# Altium PCB MT-ACcharger V1.0.0.PcbDoc (part 2 of 2)
Units mil, origin at the board's own origin, x right, y up, seen from the top; angles counter-clockwise.
Board outline 4330 x 3150 mil, 2 copper layers (Top Layer, Bottom Layer); 249 components, 156 nets, 1213 pads, 95 vias.
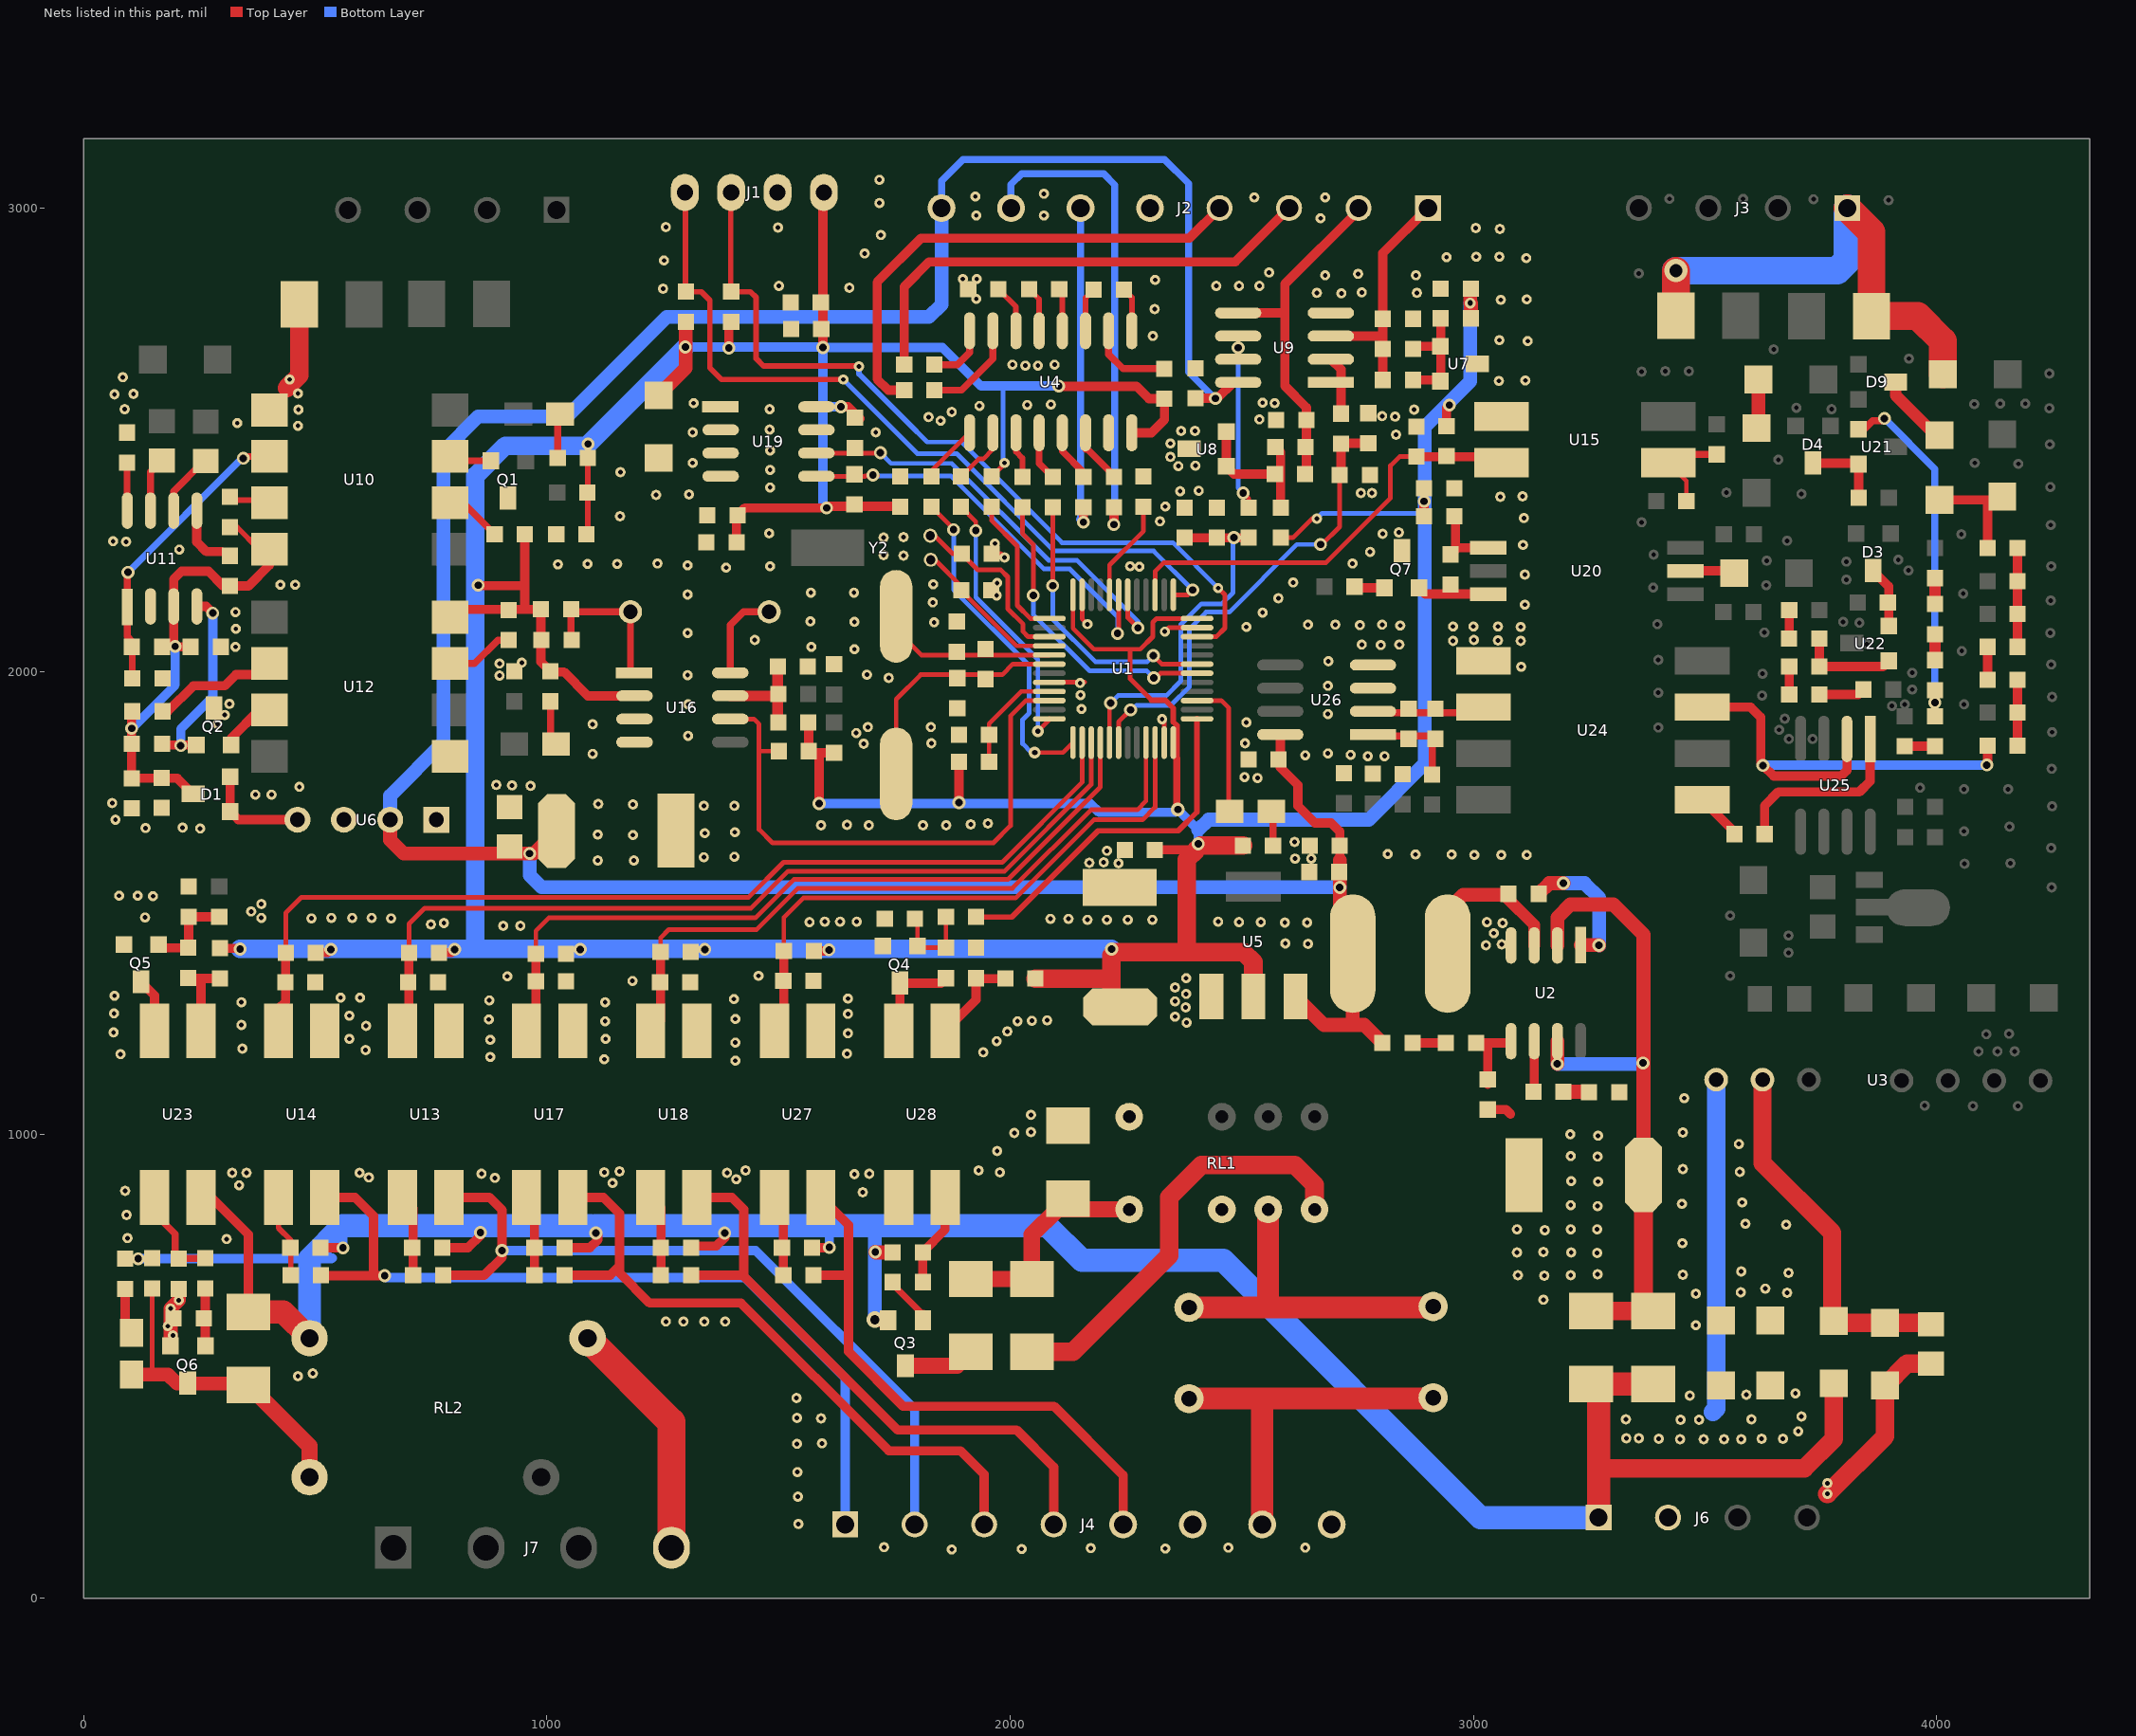
[diagram p2: the nets of this part, all layers, seen from the top]

## Via types
v1: diameter 28, hole 16, Top Layer to Bottom Layer, 77 vias
v2: diameter 22, hole 10, Top Layer to Bottom Layer, 12 vias
v3: diameter 26, hole 12, Top Layer to Bottom Layer, 2 vias
v4: diameter 36, hole 20, Top Layer to Bottom Layer, 1 vias
v5: diameter 50, hole 28, Top Layer to Bottom Layer, 1 vias
v6: diameter 30, hole 16, Top Layer to Bottom Layer, 1 vias
v7: diameter 24, hole 12, Top Layer to Bottom Layer, 1 vias

## Nets (pads, with @x,y where several pads share a name; then routed paths per layer and width w, separated by ;. In a path a pad name is that pad's centre, name@x,y a point inside that pad or via, vN(x,y) a via of type N, cw(c..) or ccw(c..) an arc to the next point about the centre after c; other vN are vias at no path point) (continued)
DGND: C1.2 C2.1 C3.1 C4.1 C8.1 C12.1 C14.1 C15.2 C16.2 C18.2 C19.2 C22.1 C23.1 C24.1 C25.1 C26.1 C28.2 C29.1 C30.1 C33.1 C34.1 C35.2 C38.2 C39.2 C41.2 C43.2 C44.2 C48.2 C49.2 C50.1 C51.1 C62.2 C66.1 C67.1 C68.1 C69.1 C71.2 EC1.2 EC2.2 EC5.2 J1.3 J2.5 L6.2 L7.2 pad.0@77,1516 pad.1@117,1516 pad.2@150,1515 pad.3@133,1469 pad.4@67,1300 pad.5@66,1262 pad.6@65,1221 pad.7@80,1174 pad.8@341,1286 pad.9@341,1237 pad.10@343,1186 pad.11@384,1498 pad.12@384,1468 pad.13@362,1482 pad.14@492,1467 pad.15@535,1468 pad.16@580,1468 pad.17@622,1468 pad.18@664,1467 pad.19@555,1296 pad.20@597,1296 pad.21@574,1257 pad.22@574,1207 pad.23@610,1235 pad.24@609,1183 pad.25@750,1454 pad.26@778,1457 pad.27@906,1451 pad.28@943,1451 pad.29@915,1342 pad.30@876,1290 pad.31@875,1249 pad.32@878,1205 pad.33@878,1168 pad.34@1126,1286 pad.35@1126,1245 pad.36@1127,1207 pad.37@1124,1163 pad.38@1185,1332 pad.39@1457,1343 pad.40@1404,1293 pad.41@1407,1250 pad.42@1407,1199 pad.43@1407,1160 pad.44@1650,1261 pad.45@1650,1219 pad.46@1648,1175 pad.47@1650,1294 pad.48@1567,1459 pad.49@1600,1460 pad.50@1633,1460 pad.51@1669,1460 pad.52@1942,1178 pad.53@1971,1202 pad.54@1994,1223 pad.55@2016,1245 pad.56@2047,1246 pad.57@2080,1247 pad.58@2087,1466 pad.59@2126,1466 pad.60@2167,1464 pad.61@2209,1464 pad.62@2254,1464 pad.63@2307,1464 pad.64@2171,1587 pad.65@2202,1588 pad.66@2234,1586 pad.67@2209,1613 pad.68@2380,1338 pad.69@2380,1304 pad.70@2379,1275 pad.71@2381,1242 pad.72@2356,1318 pad.73@2356,1288 pad.74@2356,1255 pad.75@2449,1460 pad.76@2494,1459 pad.77@2541,1459 pad.78@2593,1458 pad.79@2641,1458 pad.80@2594,1413 pad.81@2643,1412 pad.82@2815,1606 pad.83@2875,1605 pad.84@2953,1605 pad.85@3002,1604 pad.86@3060,1604 pad.87@3115,1604 pad.88@3209,1001 pad.89@3210,954 pad.90@3211,900 pad.91@3210,848 pad.92@3210,796 pad.93@3211,746 pad.94@3210,697 pad.95@3269,998 pad.96@3268,953 pad.97@3269,899 pad.98@3268,846 pad.99@3267,796 pad.100@3267,745 pad.101@3268,699 pad.102@3154,794 pad.103@3094,796 pad.104@3094,746 pad.105@3151,747 pad.106@3096,697 pad.107@3153,696 pad.108@3151,644 pad.109@3455,1079 pad.110@3452,1005 pad.111@3452,926 pad.112@3450,851 pad.113@3451,766 pad.114 pad.115@3480,657 pad.116@3480,589 pad.117@3573,980 pad.118@3575,920 pad.119@3630,668 pad.120@3675,806 pad.121@3580,854 pad.122@3587,808 pad.123@3578,705 pad.124@3680,702 pad.125@3577,660 pad.126@3677,659 pad.132@891,1755 pad.133@925,1754 pad.134@965,1753 pad.135@1481,2566 pad.136@1481,2522 pad.137@1482,2477 pad.138@1482,2435 pad.139@1482,2397 pad.140@1159,2430 pad.141@1158,2335 pad.142@1236,2381 pad.143@1307,2382 pad.144@1024,2231 pad.145@1088,2232 pad.146@1152,2232 pad.147@1239,2233 pad.148@1304,2229 pad.149@1387,2224 pad.150@1480,2298 pad.151@1482,2227 pad.152@1727,2289 pad.153@1770,2290 pad.154@1727,2251 pad.155@1770,2250 pad.156@1570,2170 pad.157@1663,2170 pad.158@1569,2108 pad.159@1664,2107 pad.160@1571,2053 pad.161@1664,2048 pad.162@1691,1993 pad.163@1304,2166 pad.164@1304,2083 pad.165@1304,1992 pad.166@1305,1929 pad.167@1305,1861 pad.168@1111,1714 pad.169@1186,1713 pad.170@1110,1648 pad.171@1186,1647 pad.172@1110,1592 pad.173@1188,1592 pad.174@1339,1710 pad.175@1405,1710 pad.176@1341,1651 pad.177@1406,1653 pad.178@1339,1599 pad.179@1405,1600 pad.180@1693,1880 pad.181@1684,1844 pad.182@1829,1880 pad.183@1830,1845 pad.184@1738,1986 pad.185@1099,1886 pad.186 pad.187 pad.188 pad.189 pad.190 pad.191 pad.192 pad.193 pad.194 pad.195 pad.196 pad.197 pad.198 pad.199 pad.200 pad.201 pad.202 pad.203 pad.204 pad.205 pad.206 pad.207 pad.208 pad.209 pad.210 pad.211 pad.212 pad.213 pad.214 pad.215 pad.216 pad.217 pad.218 pad.219 pad.220 pad.221 pad.222 pad.223 pad.224 pad.225 pad.226 pad.227 pad.228 pad.229 pad.230 pad.231 pad.232 pad.233 pad.234 pad.235 pad.236 pad.237 pad.238 pad.239 pad.240 pad.241 pad.242 pad.243 pad.244 pad.245 pad.246 pad.247 pad.248 pad.249 pad.250 pad.251 pad.252 pad.253 pad.254 pad.255 pad.256 pad.257 pad.258 pad.259 pad.260 pad.261 pad.262 pad.263 pad.264 pad.265 pad.266 pad.267 pad.268 pad.269 pad.270 pad.271 pad.272 pad.273 pad.274 pad.275 pad.276 pad.277 pad.278 pad.279 pad.280 pad.281 pad.282 pad.283 pad.284 pad.285 pad.286 pad.287 pad.288 pad.289 pad.290 pad.291 pad.292 pad.293 pad.294 pad.295 pad.296 pad.297 pad.298 pad.299 pad.300 pad.301 pad.302 pad.303 pad.304 pad.305 pad.306 pad.307 pad.308 pad.309 pad.311 pad.312 pad.313 pad.314 pad.315 pad.316 pad.317 pad.318 pad.319 pad.320 pad.321 pad.322 pad.323 pad.324 pad.325 pad.326 pad.327 pad.328 pad.329 pad.330 pad.331 pad.332 pad.333 pad.334 pad.335 pad.336 pad.337 pad.338 Q1.2 Q4.3 Q5.3 Q7.2 R6.2 R7.2 R19.1 R30.1 R31.1 R90.2 R91.1 R94.2 U1.8 U1.23 U1.35 U1.47 U2.4 U4.15 U5.1 U6.1 U7.2 U8.2 U9.4 U12.5 U13.3 U14.3 U15.3 U16.3 U16.4 U17.3 U18.3 U19.1 U19.2 U19.3 U19.4 U19.7 U24.5 U26.3 U26.4 U27.3 | length 385.5
  Top Layer w10: C30.1@1959.5,2178.5 C30.1@1959.5,2175 1972,2187.5 v2(1972,2191) ; C33.1@1960.5,2254 1980,2254 pad.330@1988,2246 ; U1.8@2084.55,1976.47 2160.47,1976.47 pad.322@2161,1977 ; U1.47@2155.42,2165.45 2155.42,2113.58 v2(2167,2102) ; v2(2328,1897) 2332.58,1892.42 U1.23@2332.58,1846.55 ; v2(2334,2086) 2342.58,2094.58 U1.35@2403.45,2094.58
  Top Layer w20: R6.2@3031,1054.5 3070.5,1054.5 3080,1045
  Bottom Layer w10: v2@1969,2170 1969,2166 v2(1971,2164)
  other v2: 1967,2276
DI1: C39.1 R49.1 U1.14 U14.4 | length 2182.2
  Top Layer w10: R49.1@436.5,1393 436.5,1478.5 470.5,1512.5 1435.5,1512.5 1511,1588 1983,1588 2155.5,1760.5 2155.5,1846.47 U1.14@2155.42,1846.55
  Top Layer w20: U14.4@420.93,1224.61 420.93,1271.93 436.5,1287.5 R49.1@436.5,1393
DI1-DET: C37.1 J4.1 U14.2 | length 1788.9
  Top Layer w20: C37.1@512.5,697 513.5,696 v1(650,696) ; U14.2@520.93,864.61 586.39,864.61 626,825 626,697
  Bottom Layer w20: v1(650,696) 654,692 1427,692 1644,475 J4.1@1644,159
DI2: C38.1 R47.1 U1.15 U13.4 | length 1923.9
  Top Layer w10: R47.1@702.5,1393 702.5,1455 736.5,1489 1441,1489 1521,1569 1988.04,1569 2175.1,1756.06 U1.15@2175.1,1846.55
  Top Layer w20: U13.4@688.6,1224.61 702.5,1238.51 R47.1@702.5,1393
DI2-DET: C36.1 J4.2 U13.2 | length 1651.7
  Top Layer w20: C36.1@776.5,697 865,697 903.2,735.2 v1(903.2,750) 903.2,837.8 876.39,864.61 U13.2@788.6,864.61
  Bottom Layer w20: v1(903.2,750) 1451,750 1794,407 J4.2@1794,159
DI3: C48.1 R55.1 U1.16 U17.4 | length 1666.6
  Top Layer w10: R55.1@976.5,1391 976.5,1440 1004.5,1468 1450,1468 1533,1551 1995,1551 2194.79,1750.79 U1.16@2194.79,1846.55
  Top Layer w20: U17.4@956.26,1224.61 976.5,1244.84 C48.1@976.5,1331 R55.1@976.5,1391
DI3-DET: C46.1 J4.3 U17.2 | length 1470.8
  Top Layer w20: U17.2@1038,846.34 U17.2@1056.26,864.61 1122.39,864.61 1156.97,830.03 1156.97,717 ; C46.1@1038.5,697 1136.97,697 1156.97,717 ; J4.3@1944,159 1944,267 1893,318 1738,318 1419,637 1222,637 1156.97,702.03 1156.97,717
DI4: C49.1 R57.1 U1.21 U18.4 | length 1505.7
  Top Layer w10: R57.1@1245.5,1395 1245.5,1425 1263.5,1443 1453,1443 1542,1532 2005,1532 2174.5,1701.5 2274.5,1701.5 2293.21,1720.21 U1.21@2293.21,1846.55
  Top Layer w20: U18.4@1223.93,1224.61 1245.5,1246.18 R57.1@1245.5,1395
DI4-DET: C47.1 J4.4 U18.2 | length 1333.7
  Top Layer w20: C47.1@1311.5,697 1423,697 1425,695 ; U18.2@1323.93,864.61 1399.39,864.61 1425,839 1425,695 ; J4.4@2094,159 2094,283 2014,363 1757,363 1425,695
DI5: C71.1 R96.1 U1.22 U27.4 | length 1292.2
  Top Layer w10: R96.1@1511.5,1397 1511.5,1469 1553.5,1511 2012,1511 2181,1680 2286,1680 2312.9,1706.9 U1.22@2312.9,1846.55
  Top Layer w20: U27.4@1491.6,1224.61 1511.5,1244.51 R96.1@1511.5,1397
DI5-DET: C70.1 J4.5 U27.2 | length 1242.3
  Top Layer w20: C70.1@1575.5,697 1651,697 ; U27.2@1591.6,864.61 1651,805.2 1651,697 ; J4.5@2244,159 2244,265 2095,414 1769,414 1651,532 1651,697
DP3V3: C1.1 C2.2 C3.2 C4.2 C11.2 C12.2 C18.1 C28.1 C31.1 C34.2 C42.1 C43.1 C44.1 EC5.1 J1.4 R1.2 R2.2 R3.2 R13.1 R18.2 R20.2 R21.2 R33.2 R36.2 R41.1 R42.1 R47.2 R49.2 R50.1 R53.2 R55.2 R57.2 R58.1 R59.1 R60.1 R61.1 R65.1 R77.1 R79.2 R96.2 R97.1 U1.24 U1.36 U1.48 U4.16 U5.2 U12.8 U16.2 U19.8 | length 12623.6
  Top Layer w10: R18.2@1960,2420.5 1988,2448.5 v2(1988,2450) ; U1.48@2135.73,2165.45 2135.73,2093.27 2181,2048 2259,2048 ; 2305,1938.27 2259,1984.27 2259,2048 ; U1.36@2403.45,2114.27 2316.27,2114.27 2308,2106 2308,2075 2281,2048 2259,2048 ; R21.2@2584,2288.49 2610.49,2288.49 2652,2330 v2(2662,2330)
  Top Layer w12: C28.1@1085.5,2296 1088.5,2299 R36.2@1088.5,2461 1088.5,2490.5 v1(1089,2491) ; 2305,1938.27 2334.73,1938.27 2352.27,1920.73 2352.27,1891 2360,1883.27 2360,1813
  Top Layer w15: 2360,1813 2360,1704 v6(2362,1702)
  Top Layer w20: R79.2@295,1402.5 336.5,1402.5 v1(338,1401) ; R49.2@501.5,1393 527,1393 v1(534,1400) ; R47.2@767.5,1393 794,1393 v1(801,1400) ; U12.8@790.88,2117 807.88,2134 954,2134 ; v1(852,2186) 853,2185 952.5,2185 ; R33.2@952.5,2296 952.5,2185 ; U16.2@1189.33,1947.24 1088.76,1947.24 1037,1999 1009.5,1999 R41.1@1008,2000.5 987.5,2021 R53.2@987.5,2134 954,2134 ; v1(1393,2698) 1393,2749.5 R3.2@1398,2754.5 ; C34.2@1409.5,2279 1409.5,2335 C43.1@1411.5,2337 1427.5,2353 v1(1604,2353) 1607.5,2356.5 1762,2356.5 C4.2@1763,2355.5 ; R59.1@1564.5,1890 1565.5,1889 R58.1@1565.5,1828 1569,1824.5 1594,1824.5 ; R96.2@1576.5,1397 1607,1397 v1(1609,1399) ; v1(1588,1715) 1588,1818.5 1594,1824.5 ; v1(1596,2699) 1596,3032 J1.4@1598,3034 ; R60.1@1620,1824.5 1594,1824.5 ; v1(1635,2571.24) 1650.26,2571.24 R61.1@1676,2545.5 ; v1(1889.5,1717) R13.1@1889.5,1805 ; v1(2105,2616) 2106,2615 2273,2615 2299.5,2588.5 C11.2@2333,2588.5 2333,2543 2305.2,2515.2 U4.16@2262.7,2515.2 ; EC5.1@2219,1294.43 EC5.1@2228.43,1285 ; C3.2@2312.5,1615 2402,1615 v1@2410.5,1623.5 ; R97.1@2893.5,2335 v1(2893.5,2367) ; R50.1@2942,2529.5 2942,2569 v1(2948,2575) ; 952.5,2185 952.5,2135.5 954,2134
  Top Layer w30: C1.1@1241.48,2595.92 1300,2654.44 R1.2@1300,2754.5 ; v7(2993,2795) C44.1@2993,2825 ; R20.2@2994.5,2762 v7@2994.5,2795
  Top Layer w40: R77.1@2054.5,1337 2219,1337 ; EC5.1@2219,1294.43 2219,1337 ; 2219,1387 2219,1337 ; v1@2226,1394 2381,1394 ; v1@2402,1615 2381,1594 2381,1394 ; v1@2411,1624 R2.2@2502.5,1624 ; U5.2@2525,1298.89 2525,1373 2504,1394 2381,1394
  Bottom Layer w10: v2(1988,2450) 1985,2447 1985,2612 1989,2616 ; v2(2662,2330) 2673,2341 2895,2341
  Bottom Layer w20: v1(1299,2700) 1597,2700 v1(1596,2699) ; v1(1588,1715) 2173,1715 2192,1696 2356,1696 v6(2362,1702) 2406,1658 v1(2406,1628) ; v1(1604,2353) 1596,2361 1596,2572 ; v1(1635,2571.24) 1596.76,2571.24 1596,2572 ; v1(2105,2616) 1989,2616 1937,2616 1854,2699 v1(1596,2699) ; 1596,2572 v1(1596,2699)
  Bottom Layer w30: 2406,1658 2428,1680 2774,1680 2895,1801 2895,2341 2895,2528 2993,2626 v7(2993,2795)
  Bottom Layer w40: v1(338,1401) 846,1401 ; v1@1086,2487 911,2487 846,2422 846,1401 ; v1@1089.5,2490.5 v1(1299,2700) ; v1(2219,1401) 846,1401
  other v1: 1072,1400 1341,1400
EL+: DC4.2 DC5.2 J4.7 | length 802.2
  Top Layer w47.24: DC5.2@2386,430.57 2544,430.57 ; J4.7@2544,159 2544,430.57 ; DC4.2@2913,432.57 2911,430.57 2544,430.57
  Bottom Layer w47.24: DC4.2@2911,430.57 DC4.2@2913,432.57
FAN1: C55.2 D7.1 LED4.2 Q6.2 RL2.1 | length 717
  Top Layer w10: C55.2@148,668.5 148,488.91 154,482.91
  Top Layer w30: LED4.2@103.66,482.91 154,482.91 182.09,482.91 201.75,463.25 334.68,463.25 D7.1@346.35,474.91
  Top Layer w35.43: D7.1@346.35,474.91 D7.1@360,461.26 ; D7.1@356,460.26 488,328.26 RL2.1@488,261
FG: J3.1 L5.1 TVS3.1 TVS4.1 | length 1091.6
  Top Layer w60: TVS3.1@3437,2768 v5(3437,2865) ; J3.1@3807,3000 3859,2948 TVS4.1@3859,2767 3959,2767 4013.16,2712.84 L5.1@4013.16,2641.47
  Bottom Layer w60: v5(3437,2865) 3785,2865 3807,2887 J3.1@3807,3000
IN-ADA: R84.2 U24.3 U25.2 | length 1036.5
  Top Layer w20: U24.3@3494,1923 3598,1923 3620,1901 3620,1802 v1(3625,1797) 3648,1774 3794,1774 3806.24,1786.24 U25.2@3806.24,1854.24 ; v1(4108,1798) v1@4109.5,1796.5 ; R84.2@4109.5,1840 v1@4109.5,1796.5 ; v1@4109.5,1796.5 4110,1796 4109.5,1795.5 v1@4109.5,1796.5
  Bottom Layer w20: v1(3625,1797) 3626,1798 v1(4108,1798)
LOCK1: R85.1 U1.25 | length 772
  Top Layer w12: R85.1@1926.5,1470 2004,1470 2190,1656 2363,1656 2403.45,1696.45 U1.25@2403.45,1897.73
NetC5_2: C5.2 D12.2 DC1.1 U3.2 | length 786.2
  Top Layer w39.37: U3.2@3624,1119 3624,939 3774,789 D12.2@3774,604.5 ; D12.2@3778,598.5 3782.58,593.92 3982.18,593.92 C5.2@3984.68,591.42
NetC7_2: C7.2 U2.1 | length 296
  Top Layer w30: C7.2@3140.5,1520 3163.5,1543 v1(3194,1543) ; U2.1@3231.24,1409.85 3270.15,1409.85 v1(3271,1409)
  Bottom Layer w30: v1(3194,1543) 3240,1543 3271,1512 v1(3271,1409)
NetC9_1: C9.1 U2.6 | length 97.3
  Top Layer w20: C9.1@3130.5,1105 3131.24,1105.74 U2.6@3131.24,1201.98
NetC9_2: C9.2 R7.1 | length 55.4
  Top Layer w30: C9.2@3194.5,1093 3248.5,1093 R7.1@3249.5,1092
NetC10_1: C10.1 U4.3 | length 96.3
  Top Layer w12: U4.3@2162.7,2735.2 2162.7,2806.33 C10.1@2180.52,2824.15
NetC10_2: C10.2 U4.1 | length 96.1
  Top Layer w12: C10.2@2245.52,2824.15 2262.7,2806.96 U4.1@2262.7,2735.2
NetC11_1: C11.1 U4.2 | length 184
  Top Layer w15: U4.2@2212.7,2735.2 2212.7,2684.3 2243.5,2653.5 C11.1@2333,2653.5
NetC13_1: C13.1 U4.5 | length 98.9
  Top Layer w12: C13.1@2041.02,2825.15 2062.7,2803.46 U4.5@2062.7,2735.2
NetC13_2: C13.2 U4.4 | length 92.7
  Top Layer w12: C13.2@2106.02,2825.15 2112.7,2818.46 U4.4@2112.7,2735.2
NetC14_2: C14.2 U4.6 | length 105.8
  Top Layer w12: C14.2@1974.52,2825.15 2012.7,2786.96 U4.6@2012.7,2735.2
NetC19_1: C19.1 R13.2 U1.9 | length 241.1
  Top Layer w10: R13.2@1954.5,1805 C19.1@1954.5,1863 1954.5,1887.29 2024,1956.79 U1.9@2084.55,1956.79
NetC32_1: C32.1 R35.1 U10.6 U11.1 | length 642.6
  Top Layer w15: v1(96,2214) 96,2212.49 94.76,2211.24 U11.1@94.76,2139.15 94.76,2075.24 105.5,2064.5 C32.1@105.5,1985 ; v1(345,2460) 349,2464 U10.6@401.12,2464
  Bottom Layer w15: v1(96,2214) 342,2460 v1(345,2460)
NetC36_2: C36.2 R46.1 U13.1 | length 177.1
  Top Layer w20: U13.1@688.6,864.61 711.5,841.7 C36.2@711.5,697
NetC37_2: C37.2 R48.1 U14.1 | length 178.6
  Top Layer w12.13: U14.1@420.93,864.61 420.93,799.07 447.5,772.5 C37.2@447.5,697
NetC40_1: C40.1 R52.2 U15.1 | length 210.3
  Top Layer w10: U15.1@3438.81,2468.5 U15.1@3420.61,2450.3 3459.5,2411.41 R52.2@3459.5,2368
  Top Layer w15: U15.1@3438.81,2468.5 C40.1@3525,2468.5
NetC42_2: C42.2 R53.1 SW1.1 U16.1 | length 320.5
  Top Layer w15: C42.2@1053.5,2068 1052.5,2069 R53.1@1052.5,2134 1057.93,2128.57 SW1.1@1180.57,2128.57 U16.1@1180.57,2004.82
NetC46_2: C46.2 R54.1 U17.1 | length 174.7
  Top Layer w20: U17.1@956.26,864.61 973.5,847.37 R54.1@973.5,756 C46.2@973.5,697
NetC47_2: C47.2 R56.1 U18.1 | length 177
  Top Layer w20: U18.1@1223.93,864.61 1246.5,842.04 R56.1@1246.5,756 C47.2@1246.5,697
NetC50_2: C50.2 R59.2 R64.1 U16.7 | length 213.2
  Top Layer w23: U16.7@1396.02,1947.24 R64.1@1489.26,1947.24 ; R59.2@1498.5,1891 C50.2@1498.5,2011
NetC53_1: C53.1 D4.2 U21.3 | length 172.3
  Top Layer w20: D4.2@3732.49,2449.65 3829.19,2449.65 U21.3@3831.35,2447.49 3831.5,2447.34 C53.1@3831.5,2375
NetC54_1: C54.1 D3.2 U22.3 | length 133.7
  Top Layer w20: D3.2@3862.49,2217.65 3896.25,2183.89 U22.3@3896.25,2097.92
NetC56_1: C56.1 R77.2 U28.1 | length 204.5
  Top Layer w20: U28.1@1859.7,1224.61 1926.5,1291.41 C56.1@1926.5,1338 1927.5,1337 R77.2@1989.5,1337
NetC56_2: C56.2 Q4.2 U28.2 | length 207.5
  Top Layer w20: U28.2@1759.7,1224.61 1762.08,1226.99 Q4.2@1762.08,1327.25 1850.75,1327.25 C56.2@1861.5,1338
NetC57_1: C57.1 R79.1 U23.1 | length 181.8
  Top Layer w20: C57.1@227,1337.5 256,1337.5 ; U23.1@253.7,1224.61 253.7,1335.2 256,1337.5 ; R79.1@295,1337.5 256,1337.5
NetC57_2: C57.2 Q5.1 R88.1 R90.1 | length 200.1
  Top Layer w20: Q5.1@162.08,1410.25 168.83,1403.5 C57.2@226,1403.5 227,1404.5 R90.1@227,1470.5 R88.1@293,1470.5
NetC58_1: C58.1 R86.1 R93.1 U26.1 | length 231.3
  Top Layer w15: U26.1@2760.24,1860.76 2906.4,1860.76 2911,1856.16 R93.1@2911,1777.5
NetC58_2: C58.2 R86.2 U24.6 U26.2 | length 266.4
  Top Layer w15: U26.2@2760.24,1910.76 3009.32,1910.76 U24.6@3021.56,1923
NetC60_1: C60.1 C61.1 R81.2 R82.1 | length 213
  Top Layer w20: R82.1@4174.5,2053 C60.1@4174.5,2124 R81.2@4174.51,2266
NetC62_1: C62.1 Q4.1 R85.2 R91.2 | length 189.8
  Top Layer w10: C62.1@1794.5,1466 1800.08,1460.42 Q4.1@1800.08,1407.25 1803.33,1404 R91.2@1861.5,1404 R85.2@1861.5,1470
NetC65_1: C65.1 Q6.1 R87.2 | length 126.1
  Top Layer w10: Q6.1@263,545.33 Q6.1@265.08,543.25
  Top Layer w20: Q6.1@263,545.33 R87.2@263,668.5
NetC70_2: C70.2 R95.1 U27.1 | length 175.4
  Top Layer w20: U27.1@1491.6,864.61 1510.5,845.7 C70.2@1510.5,697
NetC72_1: C72.1 R97.2 U20.1 | length 159
  Top Layer w20: C72.1@2951,2252.5 C72.1@2961.5,2263 ; R97.2@2961.5,2335 C72.1@2961.5,2263 ; U20.1@3032,2267 2965.5,2267 C72.1@2961.5,2263
NetC72_2: C72.2 Q7.3 U20.3 | length 155
  Top Layer w20: Q7.3@2882.51,2180.35 2895.85,2167 U20.3@3032,2167
NetD1_1: D1.1 D1.3 U6.5 | length 227.6
  Top Layer w20: D1.3@316.65,1772.51 D1.1@316.65,1697.51 334.16,1680 U6.5@462,1680
NetD5_1: D5.1 Q3.2 | length 111.3
  Top Layer w35: Q3.2@1774,501.57 D5.1@1885.31,501.57
NetD5_2: D5.2 D6.1 D8.2 RL1.1 | length 460.2
  Top Layer w35.43: D5.2@1915,688.74 D6.1@2047,688.74 2047,784.26 2101.74,839 RL1.1@2257,839
NetD6_2: D6.2 RL1.5 | length 921.9
  Top Layer w40: D6.2@2047,531.26 2135.26,531.26 2343,739 2343,865 2413,935 2614,935 2657,892 RL1.5@2657,839
NetD9_2: D9.2 L4.1 | length 159
  Top Layer w25: D9.2@3911.35,2624.49 3911.35,2595.65 3997,2510 L4.1@4006,2510
NetDC2_1: DC2.1 L4.2 R81.1 | length 245.1
  Top Layer w20: L4.2@4006,2370 4103,2370 ; R81.1@4109.51,2266 4109.51,2363.49 4103,2370 ; DC2.1@4141.52,2377.08 4134.44,2370 4103,2370
NetDC4_1: DC4.1 DC5.1 RL1.4 | length 746
  Top Layer w47.24: DC5.1@2386,627.43 2566,627.43 ; RL1.4@2557,839 2557,636.43 2566,627.43 ; DC4.1@2913,629.43 2911,627.43 2566,627.43
  Bottom Layer w47.24: DC4.1@2911,627.43 DC4.1@2913,629.43
NetL3_2: L3.2 R51.2 | length 106.3
  Top Layer w30: R51.2@3611.04,2525.33 3615,2529.29 L3.2@3615,2630
NetLED1_1: LED1.1 R2.1 | length 86.4
  Top Layer w15: LED1.1@2564.91,1709.34 2567.5,1706.75 R2.1@2567.5,1624
NetLED2_1: LED2.1 R36.1 | length 96.6
  Top Layer w15: R36.1@1023.5,2461 1023.5,2549.93 LED2.1@1028.91,2555.34
NetLED3_1: LED3.1 R41.2 | length 97.1
  Top Layer w15: R41.2@1008,1935.5 1008,1855.25 LED3.1@1019.91,1843.34
NetLED4_1: LED4.1 R98.2 | length 100.2
  Top Layer w20: R98.2@90,667.5 90,586.57 LED4.1@103.66,572.91
NetQ1_3: Q1.3 U10.3 | length 92.5
  Top Layer w15: U10.3@790.88,2464 800.23,2454.65 Q1.3@879.49,2454.65
NetQ2_1: Q2.1 R45.2 U11.4 | length 429.9
  Top Layer w20: R45.2@169.5,1844 172.15,1841.35 Q2.1@243.51,1841.35 ; U11.4@244.76,2140.33 264.67,2140.33 v1(279,2126)
  Bottom Layer w20: v1(210,1840) 210,1876 279,1945 v1(279,2126)
NetQ2_3: Q2.3 U12.3 | length 122.2
  Top Layer w20: Q2.3@318.51,1841.35 318.51,1855.51 380,1917 U12.3@401.12,1917
NetQ3_1: Q3.1 R78.2 | length 104.5
  Top Layer w15: R78.2@1743,681 1743,682 R78.2@1746.5,682 ; R78.2@1746.5,677.5 1814,610 Q3.1@1814,614.5
NetQ5_2: Q5.2 U23.2 | length 117.9
  Top Layer w20: Q5.2@124.08,1330.25 153.7,1300.63 U23.2@153.7,1224.61
NetQ7_1: Q7.1 R63.2 | length 65.1
  Top Layer w20: R63.2@2743.5,2183 2746.15,2180.35 Q7.1@2807.51,2180.35
NetR4_1: R4.1 R5.2 | length 72
  Top Layer w20: R5.2@2868.5,1198 R4.1@2940.5,1198
NetR4_2: R4.2 R6.1 U2.5 | length 168
  Top Layer w20: R4.2@3005.5,1198 3036,1198 ; R6.1@3031,1109.5 3031,1193 3036,1198 ; U2.5@3081.24,1201.98 3077.27,1198 3036,1198
NetR9_2: R9.2 U4.12 | length 108
  Top Layer w15: U4.12@2062.7,2515.2 2062.7,2449.14 R9.2@2092.33,2419.51
NetR10_1: R10.1 U4.13 | length 114.5
  Top Layer w15: U4.13@2112.7,2515.2 2112.7,2475.3 2158.17,2429.83 R10.1@2158.17,2419.5
NetR11_2: R11.2 U4.9 | length 129
  Top Layer w10: R11.2@1830,2420.5 1830,2432.5 U4.9@1912.7,2515.2
NetR12_1: R12.1 U4.8 | length 133.8
  Top Layer w15: R12.1@1836.5,2662 1886,2662 1912.7,2688.7 U4.8@1912.7,2735.2
NetR14_2: R14.2 U4.11 | length 101.4
  Top Layer w12: U4.11@2012.7,2515.2 2012.7,2474.3 2026.5,2460.5 R14.2@2026.5,2419.51
NetR15_1: R15.1 U4.14 | length 124
  Top Layer w15: U4.14@2162.7,2515.2 2162.7,2479.3 2167.7,2479.3 2224,2423 R15.1@2224,2419.5
NetR16_2: R16.2 U4.10 | length 116.8
  Top Layer w10: R16.2@1894,2420.5 1932.1,2458.6 1942,2458.6 1962.7,2479.3 U4.10@1962.7,2503
NetR17_1: R17.1 U4.7 | length 214.7
  Top Layer w15: R17.1@1836.5,2607 1895,2607 1962.7,2674.7 U4.7@1962.7,2735.2
NetR18_1: R18.1 U1.1 | length 316.7
  Top Layer w10: R18.1@1960,2355.5 1960,2326 2015.5,2270.5 2015.5,2142.5 2043.73,2114.27 U1.1@2084.55,2114.27
NetR19_2: R19.2 U1.44 | length 220.5
  Top Layer w10: U1.44@2214.47,2165.45 2214.47,2229.47 2288,2303 R19.2@2288,2355.5
NetR20_1: R20.1 R24.2 R25.2 U7.1 U7.3 | length 257
  Top Layer w20: R24.2@2869.5,2629 2925.84,2629 U7.3@2928.35,2626.49 2929.5,2627.65 R20.1@2929.5,2762 ; R25.2@2869.5,2696 2874.99,2701.49 U7.1@2928.35,2701.49
NetR21_1: R21.1 R26.2 R27.2 U8.1 U8.3 | length 322.5
  Top Layer w20: U8.3@2466.65,2517.51 U8.1@2466.65,2442.51 2483.16,2426 R27.2@2571.5,2426 ; R26.2@2572.5,2484.5 2584,2473 R21.1@2584,2353.49
NetR28_2: R28.2 U9.1 U9.2 | length 126.3
  Top Layer w20: U9.2@2692.24,2673.76 2714,2652 R28.2@2714,2556.5
NetR29_2: R29.2 U9.6 U9.7 | length 354.7
  Top Layer w10: v1(2503,2385) 2515,2373 R29.2@2515,2353.5
  Bottom Layer w10: v1(2492.24,2698.76) 2492.24,2395.76 v1(2503,2385)
NetR33_1: R33.1 U10.2 | length 124.8
  Top Layer w15: U10.2@790.88,2364 819.5,2364 R33.1@887.5,2296
NetR34_1: R34.1 U10.7 | length 86.4
  Top Layer w12: R34.1@317,2369.5 U10.7@395.62,2369.5
  Top Layer w20: U10.7@395.62,2369.5 U10.7@401.12,2364
NetR37_1: R37.1 U11.8 | length 103.8
  Top Layer w15: R37.1@94,2450.5 94,2347.78 U11.8@94.76,2347.02
NetR38_1: R38.1 U11.7 | length 118
  Top Layer w15: U11.7@144.76,2347.02 144.76,2430.76 R38.1@169,2455
NetR39_1: R39.1 U11.6 | length 138
  Top Layer w15: U11.6@194.76,2347.02 194.76,2388.76 260,2454 R39.1@264,2454
NetR42_2: R42.2 U12.7 | length 148
  Top Layer w15: U12.7@790.88,2017 844,2017 894.5,2067.5 R42.2@918,2067.5
NetR43_2: R43.2 U12.2 | length 273.3
  Top Layer w20: R43.2@170.5,1914 182,1914 237,1969 305,1969 329,1993 372,1993 396,2017 U12.2@401.12,2017
NetR44_2: R44.2 U11.5 | length 129.6
  Top Layer w20: U11.5@244.76,2347.02 244.76,2279.24 265.5,2258.5 298,2258.5
NetR62_2: R62.2 U20.5 | length 111.5
  Top Layer w20: U20.5@3457.2,2217 3561.71,2217 R62.2@3566.67,2212.04
NetR66_1: R66.1 R69.2 | length 60.7
  Top Layer w20: R69.2@3681.49,2071.33 R66.1@3681.5,2132
NetR67_1: R67.1 R68.2 | length 56
  Top Layer w25: R68.2@3996,2145.5 R67.1@3996,2201.5
NetR68_1: R68.1 R70.2 | length 56
  Top Layer w25: R70.2@3996,2024.5 R68.1@3996,2080.5
NetR69_1: R69.1 R71.2 U22.1 | length 215.5
  Top Layer w20: R69.1@3746.49,2071.33 R71.2@3746.5,2010.67 3884,2010.67 U22.1@3896.25,2022.92
NetR70_1: R70.1 R72.2 U21.1 | length 723.5
  Top Layer w15: U21.1@3831.35,2522.49 3843.49,2522.49 3862,2541 3882,2541 v1(3887,2546)
  Bottom Layer w15: v1(3887,2546) 3996,2437 v1(3996,1933)
NetR71_1: R71.1 R73.2 | length 60.7
  Top Layer w20: R73.2@3681.5,1950 R71.1@3681.5,2010.67
NetR72_1: R72.1 R75.2 | length 65
  Top Layer w20: R75.2@3931,1838.5 R72.1@3996,1838.5
NetR73_1: R73.1 R74.2 | length 99.6
  Top Layer w20: R73.1@3746.5,1950 3830.5,1950 R74.2@3841.5,1961
NetR76_1: R76.1 R78.1 U28.4 | length 202.6
  Top Layer w19.68: R78.1@1811.5,682 R76.1@1811.5,746 1811.5,747.5 1859.7,795.7 U28.4@1859.7,864.61
NetR80_1: R80.1 U25.1 | length 402.1
  Top Layer w20: R80.1@3628.5,1649 3628.5,1710.5 3658,1740 3833,1740 3856.24,1763.24 U25.1@3856.24,1854.24
NetR80_2: R80.2 U24.1 | length 102.8
  Top Layer w20: U24.1@3494,1723 3563.5,1653.5 R80.2@3563.5,1649
NetR82_2: R82.2 R83.1 | length 71
  Top Layer w20: R83.1@4109.5,1982.01 R82.2@4109.5,2053
NetR83_2: R83.2 R84.1 R89.2 | length 142
  Top Layer w20: R84.1@4174.51,1840.01 R83.2@4174.51,1982
NetR87_1: R87.1 R92.1 U23.3 | length 211.2
  Top Layer w15: U23.3@153.7,864.61 153.7,830.3 198,786 198,740.5 R92.1@206,732.5 207,733.5 R87.1@263,733.5
NetSW1_2: SW1.2 U16.8 | length 198.6
  Top Layer w15: U16.8@1396.02,1997.24 1396.02,2100.02 1424.57,2128.57 SW1.2@1480,2128.57
RUN: LED1.2 U1.27 | length 298.7
  Top Layer w10: U1.27@2403.45,1937.1 2455.9,1937.1 2472,1921 2472,1700.25 LED1.2@2473.91,1698.34
SCL: R61.2 U1.42 U19.6 | length 939.7
  Top Layer w10: U19.6@1582.02,2471.24 1719.24,2471.24 v1(1720,2472) ; U1.42@2253.84,2165.45 2253.84,2116.16 v1(2276,2094)
  Bottom Layer w10: v1(1720,2472) 1743,2449 1874,2449 2083,2240 2144,2240 2276,2108 v1(2276,2094)
SDA: R65.2 U1.43 U19.5 | length 896.6
  Top Layer w10: U19.5@1582.02,2421.24 1686.24,2421.24 1687,2422 v1@1714,2422 ; v1(2232,2082) 2234.16,2084.16 U1.43@2234.16,2165.45
  Bottom Layer w10: v1@1714,2422 1872,2422 2073,2221 2129,2221 2232,2118 v1(2232,2082)
  other v1: 1704,2424
SGND: C5.1 C65.2 D8.1 DC1.2 J4.6 J4.8 J6.2 L6.1 L7.1 pad.0@1664,915 pad.1@1696,916 pad.2@1682,876 pad.3@206,643 pad.4@182,587 pad.5@188.08,625.08 pad.6@193,567 pad.7@90,879 pad.8@93,827 pad.9@95,777 pad.10@321,918 pad.11@352,918 pad.12@336,891 pad.13@596,918 pad.14@616,908 pad.15@859,916 pad.16@888,907 pad.17@463,479 pad.18@495,485 pad.19@309,775 pad.20@1124,919 pad.21@1157,921 pad.22@1142,896 pad.23@1389,918 pad.24@1429,923 pad.25@1409,904 pad.26@1932,923 pad.27@1978,919 pad.28@2009,1004 pad.29@2045,1006 pad.30@2045,1043 pad.31@1972,965 pad.32@1257,597 pad.33@1295,597 pad.34@1340,597 pad.35@1385,597 pad.36@1539,432 pad.37@1592,388 pad.38@1540,389 pad.39@1540,333 pad.40@1594,334 pad.41@1541,272 pad.42@1542,219 pad.43@1543,160 pad.44@1728,110 pad.45@1874,105 pad.46@2025,106 pad.47@2174,108 pad.48@2335,107 pad.49@2471,109 pad.50@2637,109 pad.148@3357,345 pad.149@3400,344 pad.150@3446,343 pad.151@3497,343 pad.152@3541,343 pad.153@3578,343 pad.154@3622,344 pad.155@3668,344 pad.156@3701,360 pad.157@3708,392 pad.158@3600,386 pad.159@3487,385 pad.160@3447,385 pad.161@3329,386 pad.162@3330,345 pad.163@3467,437 pad.164@3589,439 pad.165@3695,442 pad.166@3764,248 pad.167@3764,225 Q6.3 R92.2 RL1.3 RL1.12 U3.1 U28.3 | length 1254.5
  Top Layer w30: Q6.3@188.08,544.58 pad.5@188.08,625.08 pad.3@206,643 R92.2@206,667.5
  Top Layer w40: pad.167@3764,225 3888.48,349.48 DC1.2@3888.48,458.84 3936.06,506.42 C5.1@3987.68,506.42
  Bottom Layer w40: 3517,402 3524,409 U3.1@3524,1119
STOP-IN: J7.4 RL2.4 | length 527
  Top Layer w60: RL2.4@1088,561 1269,380 J7.4@1269,109
SW0: C7.1 L1.1 U2.3 | length 319.9
  Top Layer w20: C7.1@3070.5,1513.5 C7.1@3070.5,1518
  Top Layer w25: C7.1@3070.5,1513.5 3131.24,1452.76 U2.3@3131.24,1408.67
  Top Layer w30: L1.1@2944.36,1439 2944.36,1484.36 2978,1518 C7.1@3070.5,1518
SWCLK: J1.1 R1.1 U1.37 | length 1692.1
  Top Layer w10: U1.37@2352.27,2165.45 2383.45,2165.45 v1(2394,2176)
  Top Layer w12: J1.1@1298,3034 1299,3033 R1.1@1299,2834.5 ; R1.1@1300,2819.5 1333.5,2819.5 1352,2801 1352,2655 1377,2630 v2(1640,2630)
  Bottom Layer w10: v2(1640,2630) 1800,2470 1885,2470 2095,2260 2310,2260 v1(2394,2176)
SWIO: J1.2 R3.1 U1.34 | length 1762.9
  Top Layer w10: U1.34@2403.45,2074.9 2444.9,2074.9 2463.5,2093.5 2463.5,2165.5 v2(2449,2180)
  Top Layer w12: R3.1@1397,2834.5 1397,3033 J1.2@1398,3034 ; R3.1@1398,2819.5 1439.5,2819.5 1452,2807 1452,2675 1468,2659 1673,2659 v2(1674,2658)
  Bottom Layer w10: 1798,2518 1821,2495 1895,2495 2112,2278 2351.18,2278 2449,2180.18 v2(2449,2180)
  Bottom Layer w12: v2(1674,2658) 1674,2642 1798,2518
T+: C25.2 J2.2 R26.1 R27.1 U9.5 | length 761.2
  Top Layer w20: U9.5@2492.24,2773.76 2592.76,2773.76 2593,2774 ; R27.1@2636.5,2426 2639.5,2429 C25.2@2639.5,2543 2639.5,2569.5 2593,2616 2593,2774 ; J2.2@2752,3000 2752,2995 2593,2836 2593,2774
T-: C24.2 J2.1 R24.1 R25.1 U9.3 | length 524.4
  Top Layer w20: U9.3@2692.24,2723.76 2802.74,2723.76 2804.49,2722 ; R24.1@2804.49,2629.01 2804.49,2722 ; J2.1@2902,3000 2804.49,2902.49 C24.2@2804.49,2761 2804.49,2722
TA: C23.2 R29.1 R31.2 U1.17 | length 778.4
  Top Layer w10: U1.17@2214.47,1846.55 2214.47,1929.47 v1(2217,1932)
  Top Layer w20: C23.2@2377,2288.5 R29.1@2515,2288.5
  Bottom Layer w10: v1(2217,1932) 2233,1948 2337,1948 2368.5,1979.5 2368.5,2101.5 2413,2146 2457,2146 2481,2170 2481,2287 v1(2483,2289)
TB: C22.2 R28.1 R30.2 U1.18 | length 1007.7
  Top Layer w10: U1.18@2234.16,1846.55 2234.16,1891.16 v1@2259,1916 ; v1(2670,2274) 2673,2274 2711.5,2312.5 C22.2@2711.5,2424
  Top Layer w20: C22.2@2711.5,2424 2714,2426.5 R28.1@2714,2491.5 2715,2492.5 R30.2@2773,2492.5
  Bottom Layer w10: v1(2260,1917) 2263,1917 2273,1927 2347,1927 2387,1967 2387,2092 2423,2128 2473,2128 2619,2274 v1(2670,2274)
TEST_CC: C41.1 R50.2 U1.39 U15.4 | length 947.3
  Top Layer w10: U1.39@2312.9,2165.45 2312.9,2216 2331.9,2235 2682,2235 2821,2374 2821,2444 2840.5,2463.5 C41.1@2877,2463.5
  Top Layer w20: C41.1@2877,2463.5 3047.41,2463.5 U15.4@3060.61,2450.3
U1-RX: J2.6 R10.2 | length 721.8
  Top Layer w20: v1(2158.17,2322) R10.2@2158.17,2354.5
  Bottom Layer w15: v1@2152,2328.17 J2.6@2152,3000
  Bottom Layer w20: v1@2152,2328.17 v1(2158.17,2322) ; J2.6@2152,3000 J2.6@2158.17,2993.83
U1-RXD: R9.1 U1.31 | length 604.1
  Top Layer w10: v1(2092,2185) 2092.33,2185.33 R9.1@2092.33,2354.51 ; v1(2309,2034) 2327.16,2015.84 U1.31@2403.45,2015.84
  Bottom Layer w10: v1(2092,2185) 2092,2113 2184,2021 2296,2021 v1(2309,2034)
U1-TX: J2.7 R15.2 | length 1065.8
  Top Layer w20: v1(2224,2317) R15.2@2224,2354.5
  Bottom Layer w15: J2.7@2002,3000 2002,3051 2025,3074 2202,3074 2226,3050 v1@2226,2319
  Bottom Layer w20: v1(2224,2317) v1@2226,2319
U1-TXD: R14.1 U1.30 | length 655.6
  Top Layer w10: R14.1@2026.5,2354.51 2026.5,2297.5 2050,2274 v1(2050,2164) ; v1(2310,1986) 2314.69,1986 2324.84,1996.16 U1.30@2403.45,1996.16
  Bottom Layer w10: v1(2050,2164) 2050,2123 2172,2001 2295,2001 v1(2310,1986)
U2-RX: J2.3 R12.2 | length 1069.2
  Top Layer w20: R12.2@1771.5,2662 1771.5,2830.5 1825,2884 2486,2884 J2.3@2602,3000
U2-TX: J2.4 R17.2 | length 1083.7
  Top Layer w20: R17.2@1771.5,2600 R17.2@1772.5,2600 ; R17.2@1771.5,2607 1737,2607 1713,2631 1713,2840 1808,2935 2387,2935 J2.4@2452,3000
U2_RXD: R11.1 U1.13 | length 730.2
  Top Layer w10: R11.1@1830,2355.5 1878,2307.5 v1(1878,2306) ; v3(2053,1825) 2114.18,1825 U1.13@2135.73,1846.55
  Bottom Layer w10: v1(1878,2306) 1878,2176 2041,2013 2041,1910 2027,1896 2027,1844 2046,1825 v3(2053,1825)
U2_TXD: R16.1 U1.12 | length 590.2
  Top Layer w10: R16.1@1894,2355.5 1926,2323.5 v1(1926,2304) ; v3(2060,1871) 2084.55,1895.55 U1.12@2084.55,1897.73
  Bottom Layer w10: v1(1926,2304) 1926,2160 2060,2026 v3(2060,1871)
VCAN: C21.1 C27.1 D1.2 R22.2 R34.2 R35.2 R43.1 R44.1 R45.1 U10.8 U11.3 | length 1068.5
  Top Layer w12: R34.2@316,2311.5 331.5,2311.5 379,2264 U10.8@401.12,2264
  Top Layer w20: R43.1@105.5,1914 104,1912.5 v1(104,1877) R22.2@104,1769.5 202.66,1769.5 D1.2@236.65,1735.51 ; v1@194.76,2056.24 U11.3@194.76,2140.33 194.76,2198.76 212,2216 269.82,2216 301.32,2184.5 R44.1@316,2184.5 356.5,2184.5 401.12,2229.12 U10.8@401.12,2264 ; v1@198,2053 C27.1@231.5,2053
  Bottom Layer w20: v1(104,1877) 198,1971 v1(198,2054)
VDD5V: C8.2 C15.1 C16.1 C68.2 C69.2 EC2.1 J2.8 L1.2 R5.1 U5.3 U6.4 U9.8 U26.8 | length 6668.7
  Top Layer w20: C69.2@2400,2589.5 v1@2443,2589.5 ; v1@2447.5,2589.5 2481.76,2623.76 U9.8@2492.24,2623.76 ; U26.8@2583.24,1863.76 2583.24,1792.76 2621,1755 2621,1710 2658,1673 2693,1673 2711.5,1654.5 C8.2@2711.5,1624 2711.5,1593
  Top Layer w30: U6.4@662,1680 662,1636 691,1607 v1(963,1607) 972.43,1607 EC2.1@1020.99,1655.57 ; U5.3@2615.55,1298.89 2677.44,1237 2739.64,1237 ; L1.2@2707.64,1423 L1.2@2711.5,1419.14 ; 2711.5,1593 v1(2711.5,1534) L1.2@2711.5,1419.14 ; R5.1@2803.5,1198 2764.5,1237 2739.64,1237 ; L1.2@2711.5,1419.14 L1.2@2739.64,1391 2739.64,1237
  Bottom Layer w15: J2.8@1852,3000 1852,3059 1898,3105 2333,3105 2385,3053 2385,2646 2442,2589 v1(2443,2589)
  Bottom Layer w30: U6.4@662,1680 662,1732 777,1847 777,2475 852,2550 1044,2550 1259,2765 1825,2765 1852,2792 J2.8@1852,3000 ; v1(963,1607) 963,1560 989,1534 v1(2711.5,1534)
VDD12V: D10.2 D11.2 EC1.1 U2.2 U2.7 | length 1476.1
  Top Layer w30: v1(3181,1153) 3181.24,1152.76 U2.7@3181.24,1201.98 ; U2.2@3181.24,1408.67 3181.24,1469 3209.24,1497 3302,1497 3367.01,1431.99 EC1.1@3367.01,913.43 ; D10.2@3367.01,640.73 D10.2@3388,619.74
  Top Layer w39.37: D11.2@3254,619.74 D10.2@3388,619.74
  Top Layer w40: D10.2@3367.01,640.73 EC1.1@3367.01,913.43
  Bottom Layer w30: v1(3181,1153) 3366,1153 v1(3366,1155)
VGND: C21.2 C27.2 C32.2 pad.66@85,2635 pad.67@108,2599 pad.68@67,2598 pad.69@89,2566 pad.70@445,2630 pad.71@464,2565 pad.72@332,2536 pad.73@463,2600 pad.74@425,2187 pad.75@457,2187 pad.168@64,2281 pad.169@92,2280 pad.170@207,2263 pad.171@328,2128 pad.172@329,2092 pad.173@328,2053 pad.174@289.01,1886.35 pad.175@305,1906 pad.176@315,1930 pad.177@214,1663 pad.178@252,1661 pad.179@134,1662 pad.180@69,1680 pad.181@62,1716 pad.182@371,1734 pad.183@406,1734 pad.184@466,1751 pad.185@463,2530 Q2.2 R22.1 R37.2 TVS1.2 U6.7 U10.5 U11.2 | length 191.2
  Top Layer w40: 439,2612 466,2639 TVS1.2@466,2792
VS12V: C55.1 D7.2 D10.1 D11.1 D12.1 J6.1 Q3.3 R46.2 R48.2 R54.2 R56.2 R76.2 R95.2 R98.1 RL2.2 U23.4 | length 5934.1
  Top Layer w20: U23.4@253.7,864.61 276.39,864.61 356,785 D7.2@356,617.74 ; R48.2@511.5,756 v1(560,756) ; R46.2@774.5,756 830,756 857,783 v1(857,789) ; R54.2@1038.5,756 1093,756 1110,773 1110,784 v1(1106,788) ; R56.2@1311.5,756 1315.5,760 1366,760 1384,778 v1(1384,788) ; R95.2@1572.5,756 1609,756 v1(1610,757)
  Top Layer w30: v4(1708,601) 1709,600 Q3.3@1737,600 ; v1(1709,747) 1710,746 R76.2@1746.5,746
  Top Layer w40: 3270,280 3714,280 3778,344 D12.1@3778,463.5
  Top Layer w50: D7.2@356,617.74 431.26,617.74 RL2.2@488,561 ; D11.1@3254,462.26 D11.1@3286,462.26 ; J6.1@3270,174 3270,280 3270,446.26 D11.1@3286,462.26 ; D10.1@3388,462.26 D11.1@3286,462.26
  Bottom Layer w20: v1(118,732.5) 488,732.5 535.5,732.5 537,734 ; 559.5,804 560,803.5 v1(560,756) ; v1(1610,757) 1610,803 1611,804
  Bottom Layer w30: v4(1708,601) 1708,800 1712,804
  Bottom Layer w50: RL2.2@488,561 488,732.5 559.5,804 1095,804 ; 1106,804 1611,804 1712,804 2080,804 2155,729 2460,729 3015,174 J6.1@3270,174
WDI: R58.2 U1.10 U16.6 | length 1240.7
  Top Layer w10: U16.6@1396.02,1897.24 1446.76,1897.24 1458,1886 1458,1828 ; R58.2@1500.5,1828 1458,1828 ; U1.10@2084.55,1937.1 2034.1,1937.1 2001,1904 2001,1667 1964,1630 1487,1630 1458,1659 1458,1828
X1: C26.2 R32.1 U1.5 Y1.2 | length 382.1
  Top Layer w10: Y1.2@1754,2119 1754,2090 1808.47,2035.53 U1.5@2084.55,2035.53
X2: C29.2 R32.2 U1.6 Y1.1 | length 523
  Top Layer w10: Y1.1@1754,1779 1754,1940 1807,1993 1983,1993 2005.84,2015.84 U1.6@2084.55,2015.84
Y1: C33.2 U1.3 Y2.1 | length 397.1
  Top Layer w10: Y2.1@1827.67,2293 1837,2293 1876,2254 C33.2@1895.5,2254 1930.5,2219 1980,2219 1995,2204 1995,2135 2028,2102 2028,2085.9 2039,2074.9 U1.3@2084.55,2074.9
Y2: C30.2 U1.4 Y2.2 | length 330.5
  Top Layer w10: Y2.2@1828.67,2241 1837.5,2241 C30.2@1895.5,2183 ; C30.2@1894.5,2175 2014.29,2055.21 U1.4@2084.55,2055.21
pads on no net: J6.3 J6.4 RL1.8 RL1.9 RL1.10 U1.2 U1.20 U1.26 U1.29 U1.38 U1.40 U1.41 U1.45 U1.46 U2.8 U3.3 U3.5 U5.4 U10.1 U10.4 U12.1 U12.4 U16.5 U20.2 U24.7 U24.8 U25.5 U25.6 U25.7 U26.5 U26.6 U26.7 Y2.3

## Polygon pours and split planes (outlines as drawn)
VGND on Top Layer "Top Layer-No Net" (solid, pour order 12): 84,2672 446,2672 479,2639 482,2636 482,2484 482,1775 520,1737 567,1737 587,1737 601,1723 601,1648 587,1634 525,1634 92,1634 50,1676 50,1844 50,2638 84,2672
ASS_GND on Top Layer "Top Layer-No Net" (solid, pour order 9): 3316,3044 3332,3060 3463,3060 3881,3060 3919,3022 3918,3021 3918,2869 3918,2842 3976,2784 4055,2705 4188,2705 4242,2705 4267,2680 4278,2669 4278,2453 4278,1061 4270,1053 4256,1039 4157,1039 3892,1039 3866,1065 3864,1067 3864,1194 3815,1243 3812,1246 3596,1246 3576,1246 3541,1281 3537,1285 3537,1474 3537,1502 3464,1575 3374,1665 3374,1871 3374,2299 3346,2327 3341,2332 3341,2568 3341,2649 3315,2675 3315,3043
SGND on Top Layer "Top Layer-No Net" (solid, pour order 11): 59,865 134,940 205,940 1921,940 2063,1082 2075,1094 2472,1094 2680,1094 2720,1054 2720,771 2720,743 2764,699 2770,693 2941,693 2960,674 2971,663 2971,558 2971,538 3036,473 3051,458 3349,458 3702,458 3785,375 3785,305 3785,118 3750,83 3743,76 3216,76 1603,76 1530,149 1519,160 1519,433 1519,472 1406,585 1405,586 1267,586 1245,586 1154,677 694,677 627,677 578,677 555,654 542,641 542,531 542,507 489,454 488,453 170,453 121,453 64,510 59,510 59,865
DGND on Top Layer "Top Layer-No Net" (solid, pour order 16): 1536,3097 2942,3097 3126,2913 3130,2909 3130,2858 3130,1704 3406,1428 3408,1426 3408,1229 3408,1183 3547,1044 3720,871 3720,590 3720,571 3704,555 3619,555 3354,555 3353,556 3208,556 3203,556 3137,622 3060,699 3060,874 3060,1065 2969,1156 2960,1165 2881,1165 2802,1165 2755,1212 2742,1225 2556,1225 2037,1225 1976,1164 1958,1146 1915,1146 78,1146 57,1167 47,1177 47,1212 47,1524 65,1542 85,1562 633,1562 633,1563 693,1623 716,1646 716,1727 716,2578 742,2604 747,2609 748,2610 757,2610 1093,2610 1223,2740 1239,2756 1239,2836 1239,3072 1260,3093 1264,3097 1537,3097
VGND on Bottom Layer "Top Layer-No Net" (solid, pour order 15): 89,2672 446,2672 479,2639 482,2636 482,2607 482,1775 509,1748 520,1737 575,1737 584,1737 597,1724 599,1722 599,1663 599,1646 589,1636 587,1634 560,1634 91,1634 62,1663 49,1676 49,1728 49,2637 80,2668 84,2672 89,2672
ASS_GND on Bottom Layer "Top Layer-No Net" (solid, pour order 10): 3338,3060 3881,3060 3918,3023 3920,3021 3920,2936 3920,2840 4012,2748 4055,2705 4125,2705 4242,2705 4265,2682 4278,2669 4278,2612 4278,1061 4259,1042 4257,1040 4256,1039 4244,1039 3892,1039 3879,1052 3875,1056 3875,1110 3875,1169 3792,1252 3791,1253 3580,1253 3569,1253 3537,1285 3537,1339 3537,1502 3459,1580 3373,1666 3373,1866 3373,2300 3345,2328 3340,2333 3340,2389 3340,2650 3318,2672 3315,2675 3315,2718 3315,3043 3331,3059 3332,3060 3338,3060
SGND on Bottom Layer "Top Layer-No Net" (solid, pour order 14): 2142,1094 2680,1094 2719,1055 2720,1054 2720,1042 2720,743 2758,705 2770,693 2802,693 2941,693 2966,668 2971,663 2971,643 2971,538 3027,482 3051,458 3117,458 3702,458 3765,395 3785,375 3785,332 3785,118 3752,85 3742,75 3676,75 1604,75 1523,156 1519,160 1519,193 1519,472 1409,582 1406,585 1296,585 1246,585 1151,680 1150,681 579,681 548,650 542,644 542,604 542,508 519,485 487,453 292,453 102,453 59,496 59,803 59,864 95,900 135,940 357,940 1921,940 2005,1024 2075,1094 2142,1094
DGND on Bottom Layer "Top Layer-No Net" (solid, pour order 13): 1238,3072 1264,3098 1398,3098 2940,3098 3075,2963 3129,2909 3129,2472 3129,1704 3380,1453 3407,1426 3407,1202 3407,1187 3450,1144 3450,1143 3635,958 3719,874 3719,589 3719,571 3704,556 3325,556 3204,556 3059,701 3059,920 3059,964 3059,1066 3010,1115 2960,1165 2844,1165 2802,1165 2757,1210 2742,1225 2445,1225 2037,1225 1976,1164 1959,1147 1782,1147 77,1147 60,1164 47,1177 47,1366 48,1367 48,1526 84,1562 374,1562 632,1562 669,1599 717,1647 717,1783 717,2579 748,2610 837,2610 1060,2610 1159,2709 1238,2788 1238,3071

## Keep-outs
Keep-Out Layer:
  circle w5: c196.85,2952.76 r88.58
  lines w9.84: -1,3070.87 0,78.74 ; 78.74,0 4251.97,0 ; 78.74,3149.61 4251.97,3149.61 ; 4330.71,78.74 4330.71,3070.87
  lines w10: -1,3070.87 cw(c78.24,3070.37) 78.74,3149.61 ; 0,78.74 ccw(c78.74,78.74) 78.74,0 ; 4251.97,1 ccw(c4252.47,79.24) 4330.71,78.74 ; 4251.97,3149.61 cw(c4251.97,3070.87) 4330.71,3070.87
  lines w39.37: 84,1584 200,1584 ; 195,1584 597,1584 612,1599 612,1613 612,1758 ; 555,162 555,221 ; 555,216 555,339 ; 777,90 777,153 818,194 1116,194
  lines w59.06: 916,635 1125,635 1237,523 ; 3503,1206 3777,1206 3827,1156 3827,1058

## Silkscreen, mask and mechanical layers (free items; w line width, h text height)
Top Overlay:
  circle w5: c196.85,2952.76 r196.85
  circle w5: c196.84,196.85 r196.85
  circle w5: c4133.86,196.85 r196.85
  circle w5: c4133.86,2952.76 r196.85
  text "G" at 3271,2875 h78.74
  text "CC" at 3421,2875 h78.74
  text "CP" at 3568,2875 h78.74
  text "FG" at 3715,2875 h78.74
  text "RX1" at 2070,2873 h78.74
  text "G" at 2218,2873 h78.74
  text "TX2" at 2365,2873 h78.74
  text "RX2" at 2513,2873 h78.74
  text "T+" at 2656,2873 h78.74
  text "T-" at 2805,2873 h78.74
  text "5V" at 1770,2872 h78.74
  text "TX1" at 1920,2872 h78.74
  text "L" at 640,2867 h100
  text "H" at 795,2866 h100
  text "H" at 483,2865 h100
  text "L" at 953,2865 h100
  text "CLK" at 1197,2852 h78.74
  text "IO" at 1354,2851 h78.74
  text "G" at 1449,2851 h78.74
  text "3.3" at 1549,2851 h78.74
  text "MT-ACcharger V1.0.0" at 3368,688 h100
  text "Dandelion" at 4018,578 h70
  text "12V" at 3187,224 h100
  text "GND" at 3345,224 h100
  text "stop" at 1131,206 h100
  text "DI1" at 1553,200 h100
  text "DI2" at 1704,200 h100
  text "DI3" at 1856,200 h100
  text "DI4" at 2012,200 h100
  text "DI5" at 2165,200 h100
  text "COM" at 2317,200 h100
  text "EL" at 2558,200 h100
Mechanical 1:
  circle w5: c4133.86,2952.76 r88.58
  circle w5: c4133.86,196.85 r88.58
  circle w5: c196.84,196.85 r88.58
Mechanical 2:
  lines w7.87: 4783.47,9055.11 cw(c4783.47,9035.42) 4803.15,9035.42

## Text inside footprints (layer, text, board x,y; h text height)
EC1: Top Overlay "+" at 3419.06,822.65 h31.5 r180
EC2: Top Overlay "+" at 968.94,1746.35 h31.5
EC5: Top Overlay "+" at 2146.65,1223.94 h31.5 r90
SW1: Top Overlay "ON" at 1254.9,2066.57 h31.5